# Altium PCB Central_Unit_AgOpenGPS.pcbdoc (part 4 of 4)
Units mm, origin at the board's own origin, x right, y up, seen from the top; angles counter-clockwise.
Board outline 200.19 x 122.57 mm, 2 copper layers (Top Layer, Bottom Layer); 278 components, 223 nets, 1042 pads, 421 vias.
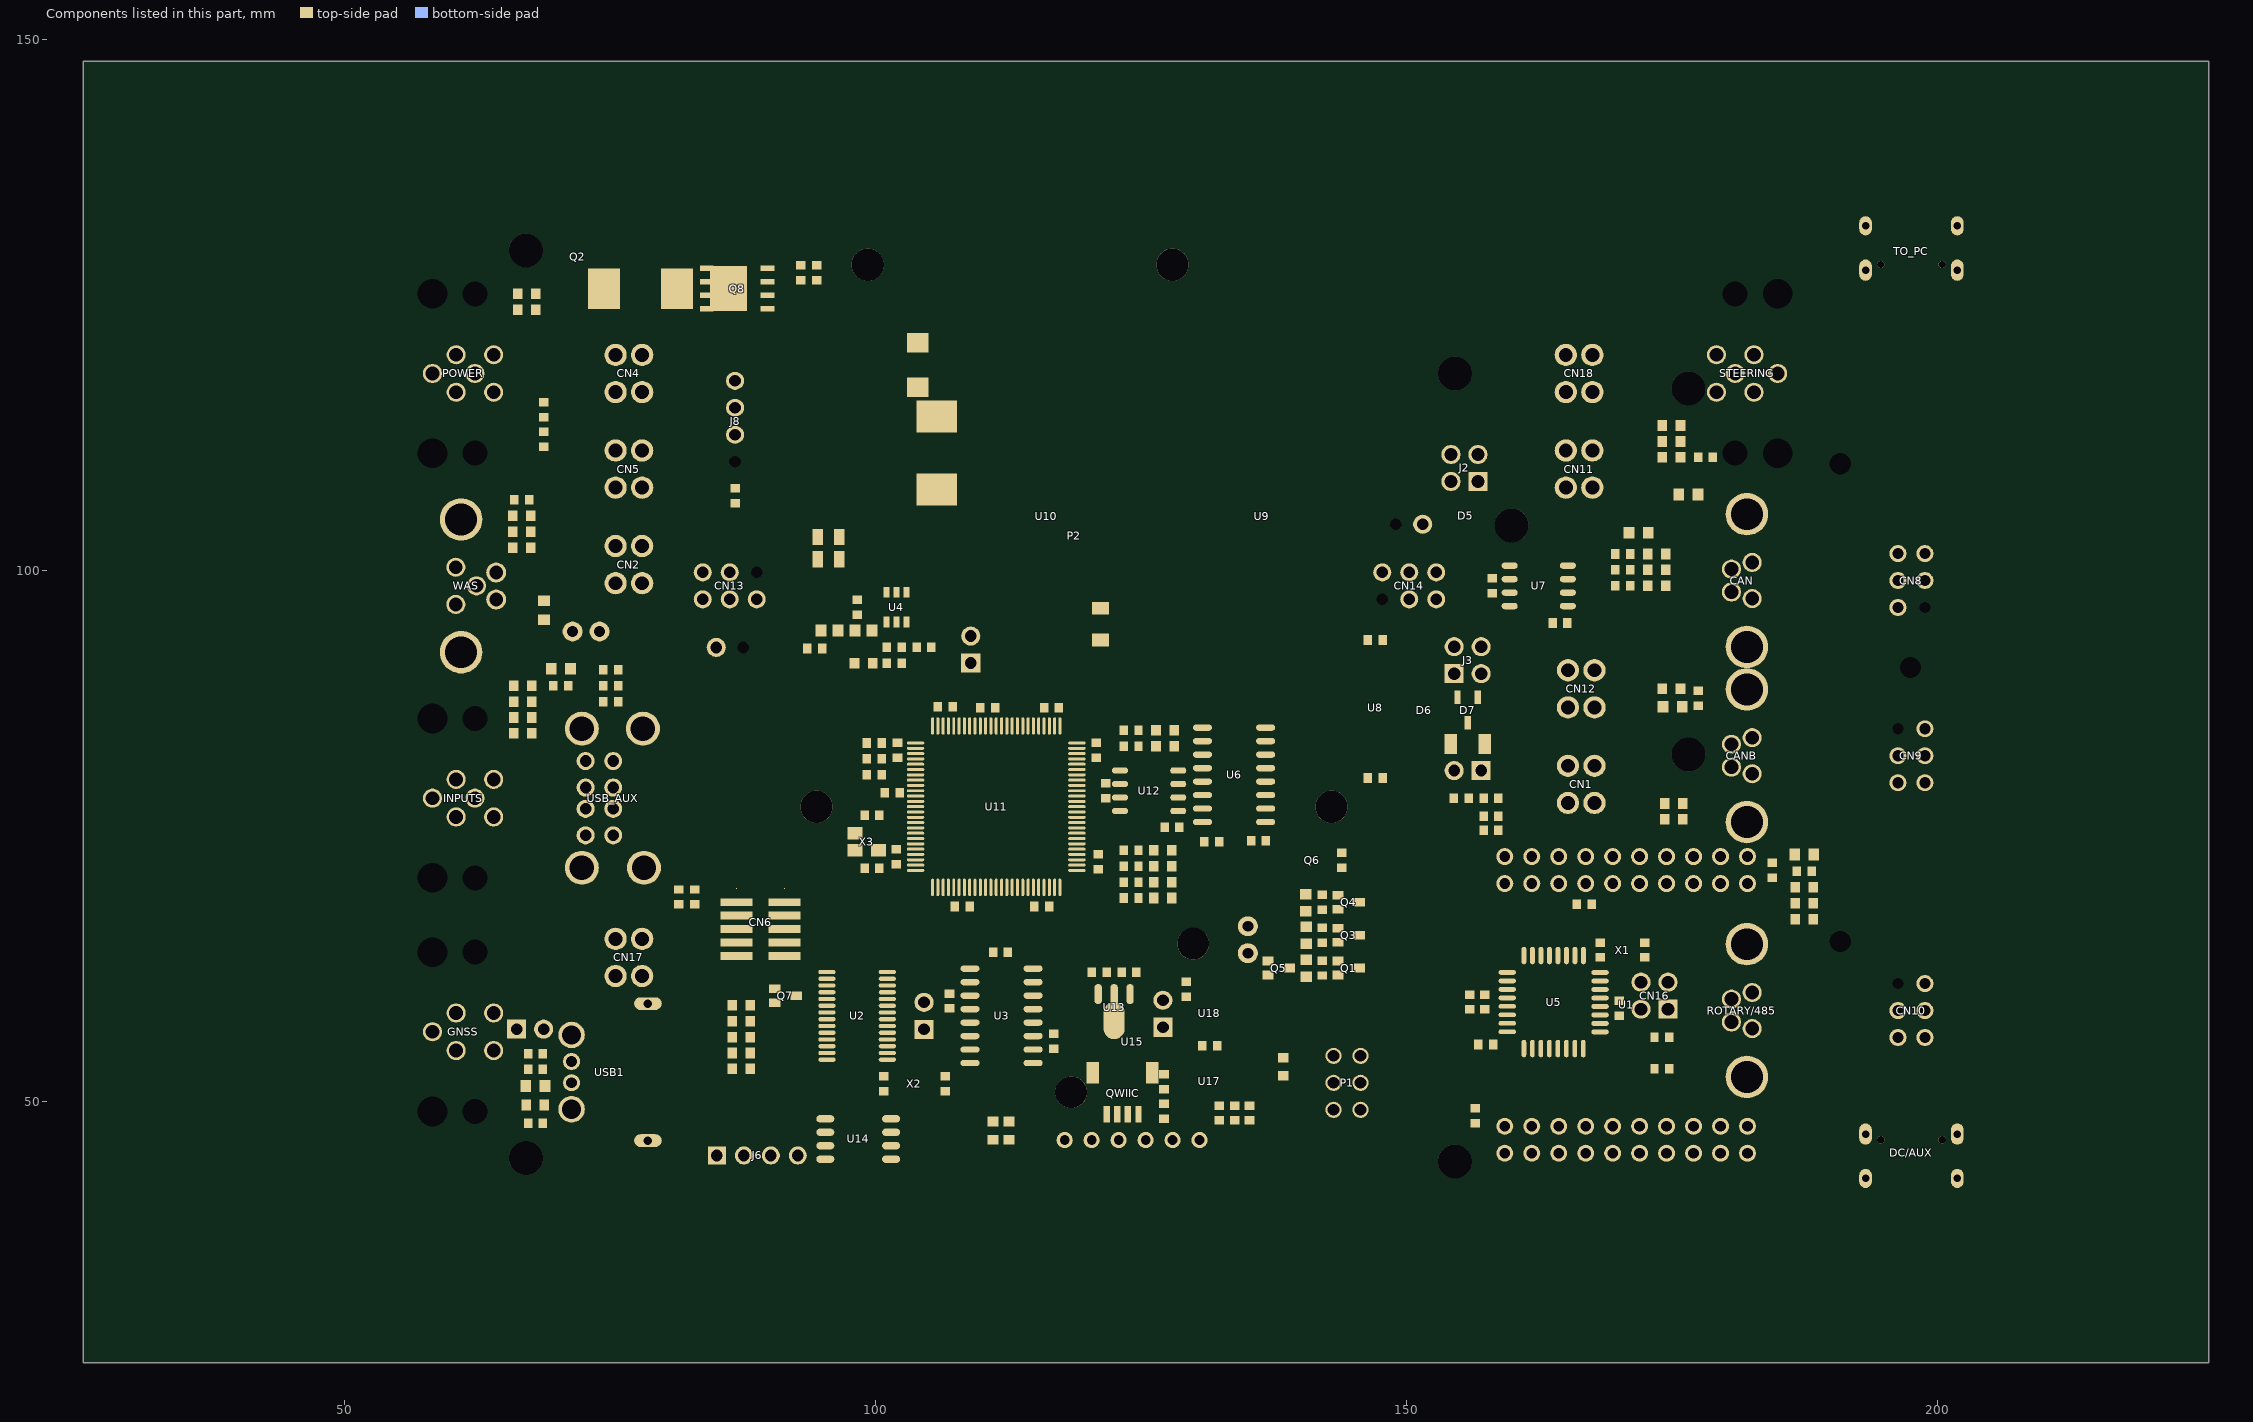
[diagram p4: the components of this part, seen from the top]

## Via types
v1: diameter 0.6, hole 0.3, Top Layer to Bottom Layer, 420 vias
v2: diameter 0.61, hole 0.305, Top Layer to Bottom Layer, 1 vias

## Nets (pads, with @x,y where several pads share a name; then routed paths per layer and width w, separated by ;. In a path a pad name is that pad's centre, name@x,y a point inside that pad or via, vN(x,y) a via of type N, cw(c..) or ccw(c..) an arc to the next point about the centre after c; other vN are vias at no path point) (continued)
pads on no net: CN6.6 CN6.7 CN6.8 CN6.11 CN6.12 CN16.1 DC/AUX. DC/AUX.A8 DC/AUX.B8 GNSS. INPUTS. P2. POWER. Q7.2 STEERING.@180.987,111.066 STEERING.@184.987,111.066 TO_PC. TO_PC.A8 TO_PC.B8 U1.5 U1.20 U1.25 U1.29 U1.33 U1.34 U1.35 U1.36 U1.37 U1.38 U1.39 U1.40 U2.25 U3.7 U3.8 U3.9 U3.10 U3.11 U3.12 U3.14 U3.15 U5.19 U6.7 U6.8 U6.9 U6.10 U6.11 U6.12 U6.13 U6.14 U10.4 U11.3 U11.4 U11.8 U11.15 U11.16 U11.17 U11.18 U11.23 U11.26 U11.27 U11.28 U11.29 U11.39 U11.40 U11.41 U11.42 U11.43 U11.44 U11.46 U11.52 U11.55 U11.56 U11.57 U11.59 U11.61 U11.62 U11.63 U11.64 U11.65 U11.66 U11.67 U11.68 U11.69 U11.70 U11.72 U11.73 U11.74 U11.77 U11.78 U11.80 U11.81 U11.82 U11.83 U11.84 U11.85 U11.86 U11.87 U11.88 U11.91 U11.92 U11.93 U11.94 U11.95 U11.97 U11.98 U11.100 U15. U15.4 U15.5 U17.2 U18.3 U18.8 U18.9 U18.11 U18.13 U18.15 U18.16

## Polygon pours and split planes (outlines as drawn)
MA on Bottom Layer (solid): 117.437,130.816 188.637,130.866 189.287,130.216 189.287,122.466 188.637,121.816 118.637,121.766
+MOTOR on Bottom Layer (solid): 53.587,116.616 53.587,128.566 55.387,130.366 55.837,130.816 117.287,130.816 118.537,121.566 144.687,121.566 144.737,99.316 143.187,97.766 122.187,97.766 115.287,104.666 114.887,105.066 114.887,115.216 105.587,124.516 74.237,124.516 66.287,116.566 62.137,116.566
+MOTOR on Bottom Layer (solid): 54.837,126.866 56.687,128.716 67.537,128.716 66.387,127.566 66.387,122.516 65.987,122.916 55.787,122.916 55.787,123.116
GND on Bottom Layer (solid): 53.637,112.166 63.737,112.216 64.137,112.616 64.687,113.866 65.387,114.666 72.187,122.466 100.187,122.466 112.487,110.166 112.487,102.416 117.537,97.366 142.987,97.366 144.887,99.216 144.887,121.516 185.637,121.516 189.137,116.566 189.137,42.716 188.537,42.116 54.637,42.116 53.787,42.966
GND2 on Bottom Layer (solid): 192.787,42.366 202.487,42.366 202.487,87.766 201.087,89.166 194.187,89.166 192.787,87.766 192.887,87.666
GND1 on Bottom Layer (solid): 192.687,132.866 201.787,132.866 202.487,132.166 202.487,94.066 201.087,92.666 194.287,92.666 192.787,94.166
GND1 on Top Layer (solid): 192.687,132.866 202.487,132.866 202.487,94.066 201.087,92.666 194.287,92.666 192.787,94.166
GND2 on Top Layer (solid): 192.987,42.366 202.387,42.366 202.487,42.466 202.487,87.766 201.087,89.166 194.187,89.166 192.887,87.866
+3V3 on Top Layer (solid): 104.187,75.366 104.187,83.866 105.387,85.066 105.287,85.066 105.387,85.066 117.387,85.066 118.687,83.766 118.687,71.766 117.387,70.466 107.987,70.666 105.137,73.516 104.487,73.666 104.187,74.866
GND on Top Layer (solid): 53.888,132.115 54.838,133.066 56.088,133.066 108.638,133.066 118.837,133.066 143.887,133.066 169.037,133.066 179.687,133.066 189.137,133.066 189.137,42.616 188.587,42.066 54.688,42.066 53.788,42.966

## Other copper
Top Layer:
  region: 191.387,65.566 191.387,64.566 190.387,64.566 190.387,65.566
  region: 196.987,91.366 197.987,91.366 197.987,90.366 196.987,90.366
  region: 191.387,110.566 191.387,109.566 190.387,109.566 190.387,110.566
  rectangle net -MIN: 87.787,129.466 96.437,130.816
  rectangle net +BATT: 103.887,115.766 105.037,116.466
  rectangle net +MOTOR: 96.087,124.266 104.588,126.016
  rectangle net +MOTOR: 95.337,125.966 104.587,127.016
  rectangle net -MIN: 81.587,122.766 88.687,127.466
  rectangle net -MIN: 73.837,128.716 77.587,130.816
  rectangle net -MIN: 76.987,127.316 88.687,130.816
  rectangle net -MOTOR: 90.587,121.466 93.487,123.266
  rectangle net +MOTOR: 75.737,124.666 76.587,128.466
  rectangle net MB: 167.787,120.066 178.787,122.416
  rectangle net +5V: 115.837,44.416 116.437,44.666
  rectangle net +MOTOR: 99.587,122.116 102.787,125.816
  rectangle net MA: 105.237,116.966 126.237,130.816
  rectangle net +5V: 94.987,89.966 98.487,91.166
  rectangle net +5V: 95.287,90.766 97.487,91.566
  rectangle net +5V: 95.587,91.566 96.087,92.566
  rectangle net +5V: 94.687,90.866 95.787,93.766
  rectangle net +VIN: 96.087,96.866 98.187,98.066
  rectangle net MB: 135.928,101.063 136.822,106.039
  rectangle net VBUS1: 199.687,125.966 200.287,127.166
  rectangle net VBUS1: 194.887,125.966 195.487,127.166
  rectangle net DP2: 197.187,48.166 197.387,48.966
  rectangle net VBUS2: 199.687,47.166 200.287,48.966
  rectangle net VBUS2: 194.887,46.966 195.487,48.766
  rectangle net MB: 130.887,105.766 152.387,122.366
  rectangle net GND: 98.987,95.866 104.287,97.266
  rectangle net +VIN: 97.787,97.466 101.287,98.166
  rectangle net +VIN: 96.487,97.966 101.287,99.666
  rectangle net +SMPS: 96.087,100.266 98.087,103.666
  rectangle net +MOTOR: 119.487,97.366 126.087,101.466
  rectangle net -MOTOR: 126.787,95.866 132.687,101.516
  rectangle net MB: 130.887,121.966 179.537,130.966
  rectangle net MA: 110.887,105.566 130.687,126.866
  rectangle net -MOTOR: 126.787,100.766 132.987,105.266
  rectangle net -MOTOR: 111.787,102.166 127.087,105.266
  rectangle net -MOTOR: 111.887,101.366 112.687,102.366
  rectangle net GND: 120.887,55.466 124.137,58.916
  rectangle net GND: 121.587,58.616 123.387,63.266
  region net MB: 136.387,110.45 133.387,107.45 133.387,101.916 139.437,101.916 139.437,103.616 140.087,104.266 143.387,104.266 143.487,104.166 143.487,102.816 143.687,102.616 144.337,103.266 147.837,103.266 147.837,107.616 147.587,107.866
  region net +MOTOR: 80.487,121.616 73.337,121.616 72.937,122.016 72.937,125.051 74.452,126.566
  region net -MIN: 76.987,127.316 81.537,122.766 82.987,122.766 84.187,123.966 84.187,127.401
  region net +MOTOR: 140.197,99.782 140.703,99.782 142.087,101.166 143.187,102.266 143.187,103.966 140.287,103.966 139.787,103.466 139.787,100.192 140.197,99.782
  region net -MOTOR: 89.187,128.716 91.887,128.716 92.637,127.966 93.487,127.966 93.737,127.716 93.737,126.966 95.887,124.816 95.887,124.116 96.037,123.966 99.237,123.966 99.387,123.816 99.387,119.466 99.037,118.966 90.387,118.966 88.887,120.466 88.887,123.866 89.187,124.166 90.587,124.166 90.687,124.266 90.687,125.016 90.537,125.166 89.337,125.166 89.187,125.316
Bottom Layer:
  region: 191.387,65.566 191.387,64.566 190.387,64.566 190.387,65.566
  region: 196.987,91.366 197.987,91.366 197.987,90.366 196.987,90.366
  region: 191.387,110.566 191.387,109.566 190.387,109.566 190.387,110.566
  rectangle net -MIN: 65.387,114.666 74.087,118.766
  rectangle net -MIN: 63.487,118.266 75.987,121.666
  rectangle net VBUS1: 195.487,103.766 199.387,106.266
  rectangle net VBUS2: 195.587,51.066 199.487,53.566
  rectangle net MA: 186.087,117.816 189.188,122.006
  rectangle net +MOTOR: 53.587,113.416 62.237,117.416

## Silkscreen, mask and mechanical layers (free items; w line width, h text height)
Top Overlay:
  lines w0.15 net S$18375: 53.287,43.563 189.287,43.566 ; 53.287,131.566 189.387,131.566
  lines w0.15 net S$55412: 96.987,131.066 97.687,131.066 129.887,131.066 132.387,128.566 143.787,128.566 145.287,127.066
  lines w0.15 net S$55414: 91.887,126.966 91.887,127.666
  lines w0.15 net S$55416: 145.287,120.166 145.287,93.066 ; 145.287,93.066 145.287,93.066
  lines w0.15 net S$55420: 145.287,77.866 145.287,83.416
  lines w0.15 net S$55422: 145.287,70.066 145.287,70.966
  lines w0.15 net S$55424: 145.287,66.966 145.287,67.566
  lines w0.15 net S$55426: 145.287,63.766 145.287,64.466
  lines w0.15 net S$55428: 142.987,62.466 143.887,62.466
  lines w0.15 net S$55430: 133.687,62.466 139.487,62.466
  lines w0.15 net S$55432: 128.787,62.466 133.087,62.466
  lines w0.15 net S$55434: 118.087,62.566 119.287,62.566
  lines w0.15 net S$55436: 114.087,62.466 115.687,62.466
  lines w0.15 net S$55438: 107.987,62.466 109.687,62.466
  lines w0.15 net S$55440: 100.487,62.466 102.787,62.466
  lines w0.15 net S$55442: 94.687,62.466 96.187,62.466
  lines w0.15 net S$55444: 91.987,81.566 91.987,63.166 92.287,62.866
  lines w0.15 net S$55446: 91.987,87.166 91.987,92.866
  lines w0.15 net S$55452: 177.087,76.666 179.087,76.666
  lines w0.15 net S$55454: 179.087,76.716 179.087,83.066
  lines w0.15 net S$55456: 179.087,91.566 179.087,106.266
  lines w0.15 net S$55458: 179.087,114.566 179.087,122.766
  lines w0.15 net S$55460: 149.487,126.666 177.487,126.666
  lines w0.15 net S$55462: 147.987,76.666 152.787,76.666
  lines w0.15 net S$55464: 129.087,105.266 129.087,114.366
  lines w0.15 net S$55466: 129.087,96.666 129.087,103.366
  lines w0.15 net S$55468: 129.087,81.716 129.087,85.916
  lines w0.15 net S$55470: 129.787,76.666 131.587,76.666
  lines w0.15 net S$55474: 135.987,76.666 141.387,76.666
  lines w0.3 net S$57182: 129.187,56.066 133.687,56.066 133.687,60.566 129.187,60.566 129.187,56.066
  text "Ardusimple" at 132.679,128.566 h1 r359
  text "QtOpenGuidance" at 120.287,117.45 h2.03
  text "V1.2" at 128.237,114.2 h2.03
  text "CANtact" at 105.587,74.25 h2.03
  text "o" at 91.435,70.026 h1 r136
Top Solder:
  region: 191.387,65.566 191.387,64.566 190.387,64.566 190.387,65.566
  region: 196.987,91.366 197.987,91.366 197.987,90.366 196.987,90.366
  region: 191.387,110.566 191.387,109.566 190.387,109.566 190.387,110.566
  rectangle: 129.787,57.616 133.137,59.016
  rectangle: 130.237,56.666 132.637,60.066
  text "12-2020" at 122.687,110.066 h2.03
Bottom Solder:
  region: 191.387,65.566 191.387,64.566 190.387,64.566 190.387,65.566
  region: 196.987,91.366 197.987,91.366 197.987,90.366 196.987,90.366
  region: 191.387,110.566 191.387,109.566 190.387,109.566 190.387,110.566

## Text inside footprints (layer, text, board x,y; h text height)
CAN: Top Overlay "F" at 199.687,95.882 h2.03 r180
CANB: Top Overlay "F" at 199.687,79.382 h2.03 r180
GNSS: Top Overlay "F" at 47.787,62.582 h2.03 r180
INPUTS: Top Overlay "F" at 47.787,84.582 h2.03 r180
POWER: Top Overlay "M" at 46.771,121.566 h2.03 r270
QWIIC: Document "SCL" at 121.987,50.116 h0.2 r180; Document "SDA" at 123.087,50.116 h0.2 r180; Document "3.3V" at 124.087,50.116 h0.2 r180; Document "GND" at 125.087,50.116 h0.2 r180
ROTARY/485: Top Overlay "F" at 199.687,55.382 h2.03 r180
STEERING: Top Overlay "F" at 196.503,113.566 h2.03 r90
U1: Top Overlay "WEMOS D1 ESP32" at 158.287,49.377 h1.78
WAS: Top Overlay "F" at 44.403,95.666 h2.03 r90